# EAGLE board dimming headlights (EAGLE 7.6.0)

Size 73.58 x 63.39 mm. Coordinates in mm from the lower left corner, seen from the top.
Outline: 0,0 56.82,0 56.82,53.33 0,53.33 0,0
Copper layers (1*16): Top 0.035mm / dielectric 1.5mm / Bottom 0.035mm
Design rules "default": minimum track width 10mil, minimum drill 24mil, track to track 8mil, track to pad 8mil, pad to pad 8mil, via to via 8mil, smd to smd 8mil, copper to edge 40mil, drill to drill 8mil, minimum pad ring 10mil, minimum via ring 8mil, stop-mask expansion 4mil, vias tented up to drill 0mil, thermal gap 10mil

## Footprints (pad centres in the part's own frame; a part is rotated, then mirrored left to right if it is on the bottom)
DC-POWER = drill 0.889 pad 2.54 octagon: + 0,2.54; - 0,-2.54
HDSP-M = drill 0.813 long: 1 -5.08,-7.62; 2 -2.54,-7.62; 3 0,-7.62; 4 2.54,-7.62; 5 5.08,-7.62; 6 5.08,7.62; 7 2.54,7.62; 8 0,7.62; 9 -2.54,7.62; 10 -5.08,7.62
1X8P-2.54-2.54-11.6-3.0-BLACK-MALE = drill 0.889 pad 1.651 square: 1 0,8.89 | drill 0.889 pad 1.651: 2 0,6.35; 3 0,3.81; 4 0,1.27; 5 0,-1.27; 6 0,-3.81; 7 0,-6.35; 8 0,-8.89
2P-2.54-65/35MIL = drill 0.889 pad 1.651 square: 1 0,1.27 | drill 0.889 pad 1.651: 2 0,-1.27
0207/10 = drill 0.813 octagon: 1 -5.08,0; 2 5.08,0
PHOTORESISTOR-2.54 = drill 1 pad 1.5: P$1 -1.27,0; P$2 1.27,0
1X3P-2.54-2.54-11.6-3.0-BLACK-MALE = drill 0.889 pad 1.651 square: 1 0,2.54 | drill 0.889 pad 1.651: 2 0,0; 3 0,-2.54
TO92 = drill 0.813 octagon: 1 1.27,0; 2 0,1.905; 3 -1.27,0
ARDUINO_UNO = drill 1.016 pad 1.88: 0 63.5,50.8; 1 60.96,50.8; 2 58.42,50.8; 3 55.88,50.8; 3.3V 35.56,2.54; 4 53.34,50.8; 5 50.8,50.8; 5V 38.1,2.54; 6 48.26,50.8; 7 45.72,50.8; 8 41.656,50.8; 9 39.116,50.8; 10 36.576,50.8; 11 34.036,50.8; 12 31.496,50.8; 13 28.956,50.8; A0 50.8,2.54; A1 53.34,2.54; A2 55.88,2.54; A3 58.42,2.54; A4 60.96,2.54; A5 63.5,2.54; AREF 23.876,50.8; GND 26.416,50.8; GND. 43.18,2.54; GND.. 40.64,2.54; I/OREF 30.48,2.54; N/C 27.94,2.54; RESET 33.02,2.54; SCL 18.796,50.8; SDA 21.336,50.8; VIN 45.72,2.54 | hole 3.2: 66.04,7.62; 66.04,35.56; 15.24,50.8; 13.97,2.54
DIL16 = drill 0.813 long: 1 -8.89,-3.81; 2 -6.35,-3.81; 3 -3.81,-3.81; 4 -1.27,-3.81; 5 1.27,-3.81; 6 3.81,-3.81; 7 6.35,-3.81; 8 8.89,-3.81; 9 8.89,3.81; 10 6.35,3.81; 11 3.81,3.81; 12 1.27,3.81; 13 -1.27,3.81; 14 -3.81,3.81; 15 -6.35,3.81; 16 -8.89,3.81

## Placement (x,y rotation side)
BAT1  [DC-POWER]  5,35.48 0 top
Digit1  [HDSP-M]  5,162.48 0 top  (outside the outline)
JP1  [1X8P-2.54-2.54-11.6-3.0-BLACK-MALE]  5,276.78 0 top  (outside the outline)
L1  [2P-2.54-65/35MIL]  5,60.88 0 top
R1  100‎Ω  [0207/10]  5,48.18 0 top
R2  [PHOTORESISTOR-2.54]  5,289.48 0 top  (outside the outline)
R3  100‎Ω  [0207/10]  5,86.28 0 top  (outside the outline)
R4  10k‎Ω  [0207/10]  5,98.98 0 top  (outside the outline)
R6  300‎Ω  [0207/10]  5,175.18 0 top  (outside the outline)
R7  3.3k‎Ω  [0207/10]  5,124.38 0 top  (outside the outline)
R8  3.3k‎Ω  [0207/10]  5,137.08 0 top  (outside the outline)
R9  3.3k‎Ω  [0207/10]  5,149.78 0 top  (outside the outline)
R10  300‎Ω  [0207/10]  5,187.88 0 top  (outside the outline)
R11  3.3k‎Ω  [0207/10]  5,264.08 0 top  (outside the outline)
R12  300‎Ω  [0207/10]  5,200.58 0 top  (outside the outline)
R13  300‎Ω  [0207/10]  5,213.28 0 top  (outside the outline)
R14  300‎Ω  [0207/10]  5,225.98 0 top  (outside the outline)
R15  300‎Ω  [0207/10]  5,238.68 0 top  (outside the outline)
R16  300‎Ω  [0207/10]  5,251.38 0 top  (outside the outline)
SERVO1  [1X3P-2.54-2.54-11.6-3.0-BLACK-MALE]  5,73.58 0 top  (outside the outline)
T1  [TO92]  5,22.78 0 top
U1  [ARDUINO_UNO]  5,10.08 0 top
U2  [DIL16]  5,111.68 0 top  (outside the outline)

## Library data of the parts
BAT1 Digit1 JP1 L1 R1-R4 R6-R16 SERVO1 T1 U1 U2 = AUTODESK_CIRCUITS_BREADBOARD

## Nets
N$1: R1.1 U1.3
N$2: R1.2 T1.2
N$3: BAT1.+ L1.1
N$4: L1.2 T1.3
N$5: SERVO1.3 U1.5
N$6: R2.P$2 R4.1 U1.A5
N$7: R2.P$1 R3.1
N$8: R4.2 U1.GND.
N$9: BAT1.- Digit1.8 R7.1 R8.1 R9.1 R11.1 SERVO1.1 T1.1 U1.GND U2.5 U2.8
N$10: R12.1 U2.13
N$11: R15.1 U2.12
N$12: R14.1 U2.10
N$13: R16.1 U2.9
N$14: R6.1 U2.15
N$15: R10.1 U2.14
N$16: Digit1.9 R6.2
N$17: Digit1.10 R10.2
N$18: Digit1.7 R12.2
N$19: Digit1.4 R13.2
N$20: R13.1 U2.11
N$21: Digit1.2 R14.2
N$22: Digit1.1 R16.2
N$23: R11.2 U1.11 U2.6
N$24: JP1.4 R3.2 SERVO1.2 U1.5V U2.3 U2.4 U2.16
N$25: Digit1.3 U1.GND..
N$26: Digit1.6 R15.2
N$27: R7.2 U1.6 U2.7
N$28: R8.2 U1.9 U2.1
N$29: R9.2 U1.10 U2.2

## Tracks (layer width: path | path; a pad name or v marks a point on that pad's centre or on a via)
N$1  (1 unrouted)
N$2  (1 unrouted)
N$3  (1 unrouted)
N$4  (1 unrouted)
N$5  (1 unrouted)
N$6  (2 unrouted)
N$7  (1 unrouted)
N$8  (1 unrouted)
N$9  (10 unrouted)
N$10  (1 unrouted)
N$11  (1 unrouted)
N$12  (1 unrouted)
N$13  (1 unrouted)
N$14  (1 unrouted)
N$15  (1 unrouted)
N$16  (1 unrouted)
N$17  (1 unrouted)
N$18  (1 unrouted)
N$19  (1 unrouted)
N$20  (1 unrouted)
N$21  (1 unrouted)
N$22  (1 unrouted)
N$23  (2 unrouted)
N$24  (6 unrouted)
N$25  (1 unrouted)
N$26  (1 unrouted)
N$27  (2 unrouted)
N$28  (2 unrouted)
N$29  (2 unrouted)